# Altium PCB temp1.robcon.powerboard.PcbDoc
Units mil, origin at the board's own origin, x right, y up, seen from the top; angles counter-clockwise.
Board outline 6000 x 4000 mil, 2 copper layers (Top Layer, Bottom Layer); 15 components, 3 nets, 37 pads, 4 vias.
Unrouted connection lines stored in the file: 9.
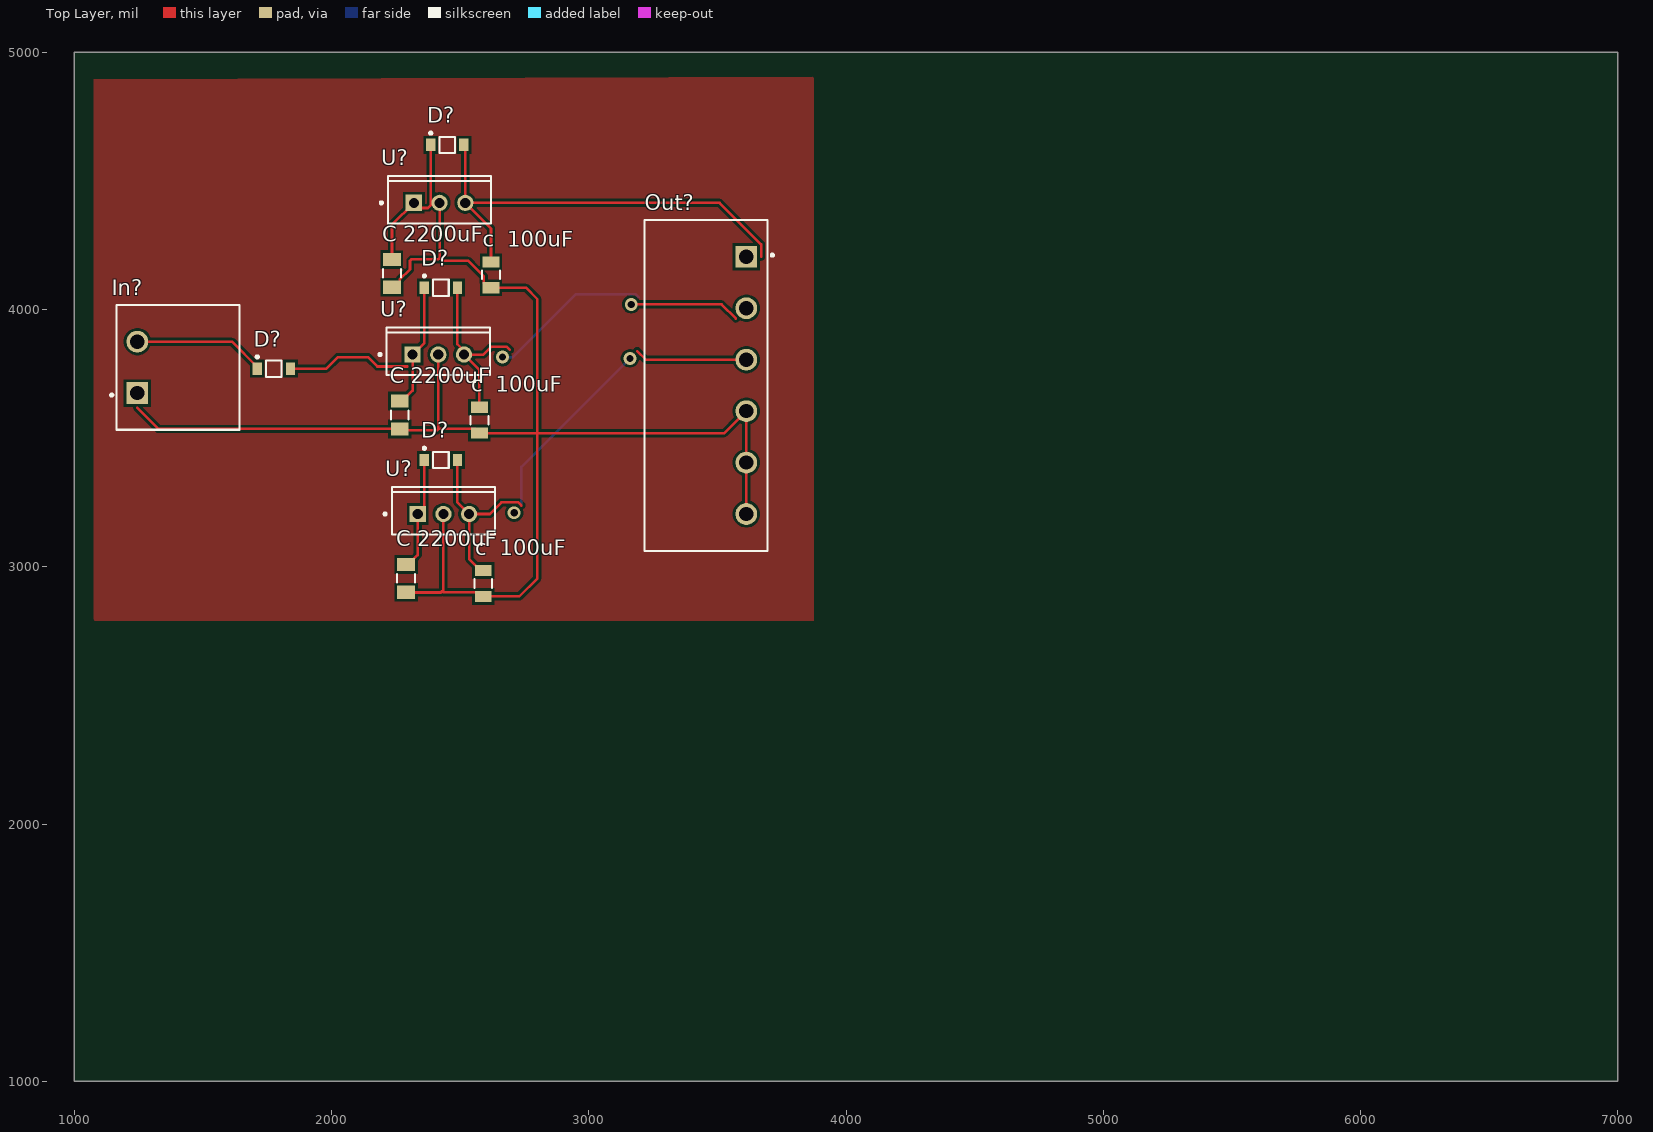
[diagram p0: Top Layer view]
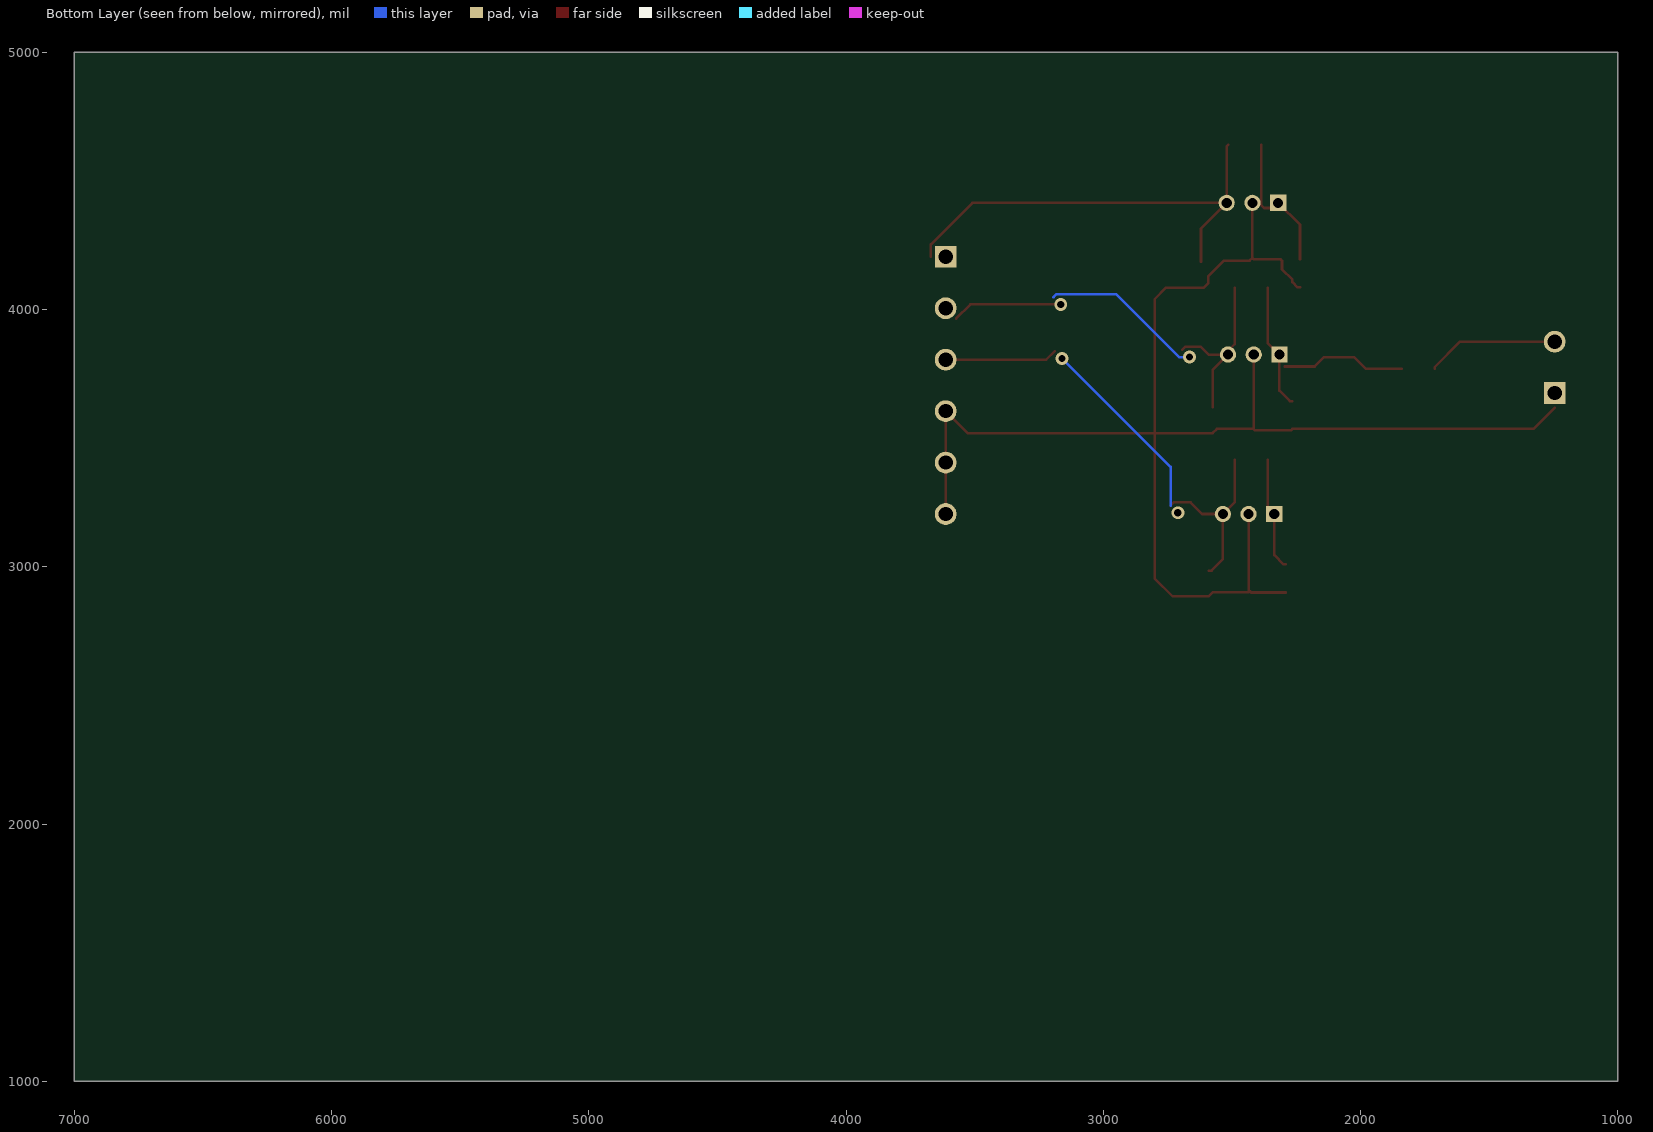
[diagram p1: Bottom Layer view, seen from below]
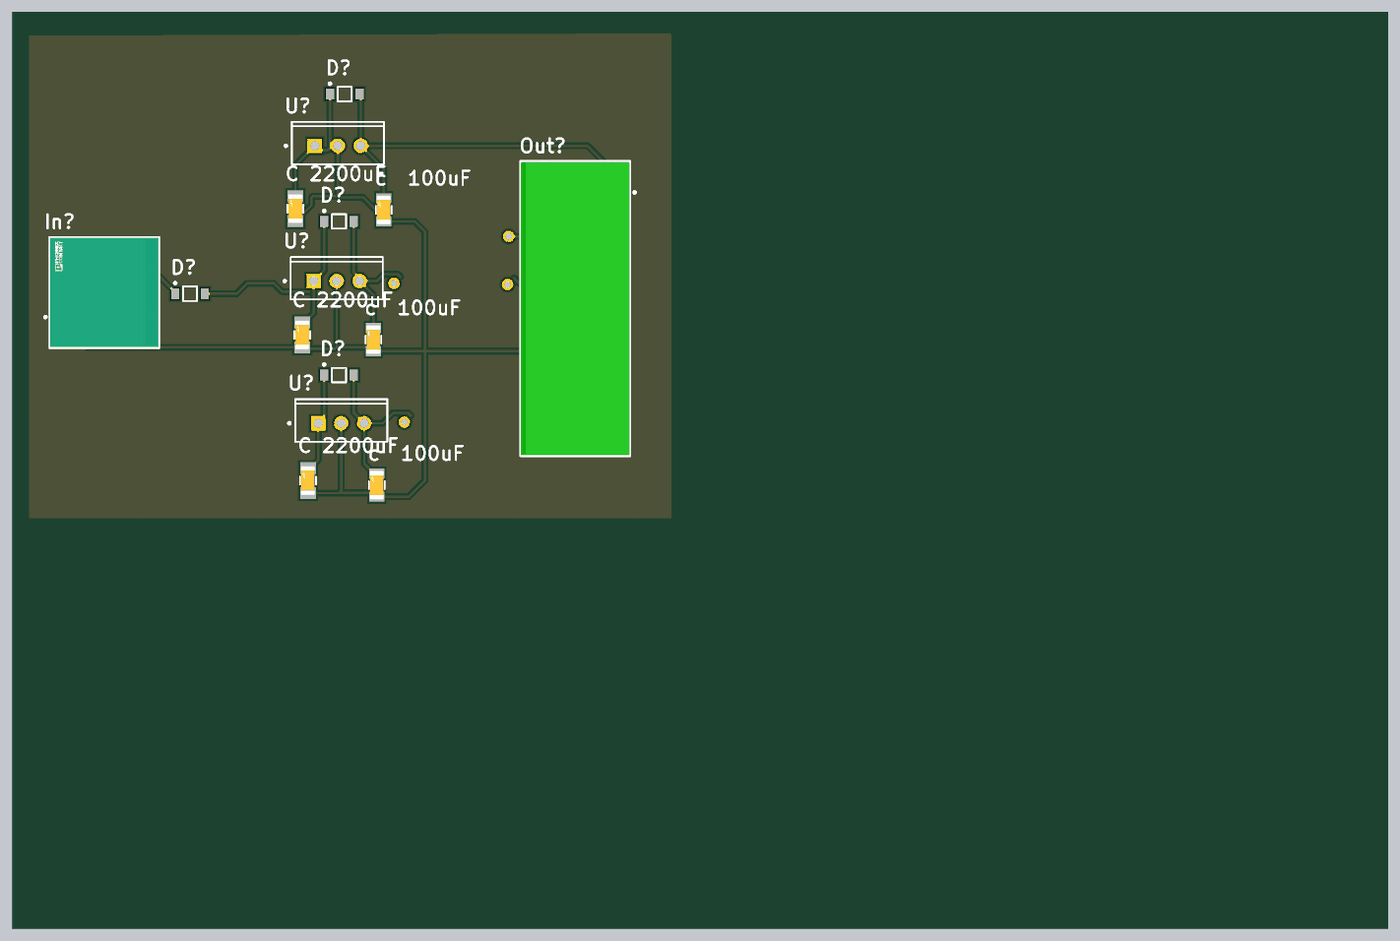
[diagram p2: 3D render of the assembled board from above, using the file's embedded part models]

## Layer stack, top to bottom
Top Solder: solder mask 0.4, Solder Resist, Dk 3.5
Top Layer: signal copper 1.4
Dielectric 1: dielectric 12.6, FR-4, Dk 4.8
Bottom Layer: signal copper 1.4
Bottom Solder: solder mask 0.4, Solder Resist, Dk 3.5

## Board outline
1000,1000 7000,1000 7000,5000 1000,5000

## Design rules (kind name [scope] priority, off if disabled: settings)
Clearance [All] p1: gap=10 ignorepadtopadclearanceinfootprint=FALSE except(0: Arc-Hole Track-Hole SMDPad-Hole THPad-Hole Via-Hole Fill-Hole Poly-Hole Region-Hole Text-Hole)
PolygonConnect [All] p1: connectstyle=Relief reliefconductorwidth=10 reliefentries=4 polygonreliefangle="90 Angle" airgapwidth=10
RoomDefinition "temp1.robcon.powerboard.sche in out" [InComponentClass('temp1.robcon.powerboard.sche in out')] p1: confinementstyle=ConfineIn formatcopy=TRUE lockcomponents=FALSE outline 2950,935 4035,935 4035,2355 2950,2355
RoomDefinition temp1.robcon.powerboard.sche [InComponentClass('temp1.robcon.powerboard.sche')] p2: confinementstyle=ConfineIn formatcopy=TRUE lockcomponents=FALSE outline 1615,2869.75 6400,2869.75 6400,3434.75 1615,3434.75
RoutingVias [All] p1: holewidth=28 width=50 viastyle="Through Hole" minholewidth=28 minwidth=50 maxholewidth=28 maxwidth=50
SolderMaskExpansion [All] p1: expansion=4 istentingtop=FALSE
Width [All] p1: maxlimit=10 minlimit=10 preferedwidth=10
30 further rules are at their usual default settings.

## Classes and differential pairs
component class temp1.robcon.powerboard.sche: "c  100uF" D?
component class "temp1.robcon.powerboard.sche in out": In? Out?

## Components (designator, comment, footprint, x,y, rotation, side; value= is the part's Value field where it differs from the comment)
"C 2200uF" "CL31C221JGFNNNF" FP-CL31-IPC_B 2265,3590 r90 top
"C 2200uF" "CL31C221JGFNNNF" FP-CL31-IPC_B 2235,4140.56 r90 top
"C 2200uF" "CL31C221JGFNNNF" FP-CL31-IPC_B 2290,2955 r90 top
"c  100uF" "CL31C221JGFNNNF" FP-CL31-IPC_C 2575,3569.75 r90 top
"c  100uF" "CL31C221JGFNNNF" FP-CL31-IPC_C 2620,4135 r90 top
"c  100uF" "CL31C221JGFNNNF" FP-CL31-IPC_C 2590,2935 r90 top
D? "MMSZ4713T1G" ONSC-SOD-123-2-425-04_V 2450,4640 r0 top
D? "MMSZ4713T1G" ONSC-SOD-123-2-425-04_V 2425,3415 r0 top
D? "MMSZ4713T1G" ONSC-SOD-123-2-425-04_V 1775.63,3770 r0 top
D? "MMSZ4713T1G" ONSC-SOD-123-2-425-04_V 2425,4085 r0 top
In? "1757242" FP-1757242-MFG 1402.48,3775 r90 top
Out? "1757284" FP-1757284-MFG 3455,3705 r270 top
U? "LM7805CT" FAIR-TO-220-3 2420,4414.75 r90 top
U? "LM7805CT" FAIR-TO-220-3 2435,3205 r90 top
U? "LM7805CT" FAIR-TO-220-3 2415,3825 r90 top

## Footprints (in the part's own frame and the unit in brackets; to place one, negate y for a bottom-side part, rotate by r counter-clockwise, add the part's x,y. Pads: shape width x height; smd on the part's side, far side on the other; paste and mask are expansions set on the pad)
FAIR-TO-220-3 [mm] "FM, 3-Leads, Body 10.2x4.7mm, Pitch 2.54mm"
  rect 1.6x1.6 hole 1: 1(0,2.54)
  round 1.6 hole 1: 2(0,0) 3(0,-2.54)
  silkscreen extent -2.04,-5.1 2.66,5.87, body extent -2.04,-5.1 2.66,5.1, height 18.95
FP-1757242-MFG [mm]
  rect 2.15x2.15 hole 1.4 paste-1000 mask+0: 1(-2.54,4)
  round 2.15 hole 1.4 paste-1000 mask+0: 2(2.54,4)
  silkscreen extent -6.15,-6.07 6.15,6.65, body extent -6.25,-6.17 6.25,6.17, height 0.25
FP-1757284-MFG [mm]
  rect 2.15x2.15 hole 1.4 paste-1000 mask+0: 1(-12.7,4)
  round 2.15 hole 1.4 paste-1000 mask+0: 2(-7.62,4) 3(-2.54,4) 4(2.54,4) 5(7.62,4) 6(12.7,4)
  silkscreen extent -16.34,-6.07 16.34,6.7, body extent -16.44,-6.17 16.44,6.17, height 0.25
FP-CL31-IPC_B [mil]
  rect 51.4x69.22 smd paste+0 mask+0: 1(-54.19,0) 2(54.19,0)
  silkscreen extent -17,-35 17,35, body extent -90,-44 90,44, height 10
FP-CL31-IPC_C [mil]
  rect 43.52x65.28 smd paste+0 mask+0: 1(-50.25,0) 2(50.25,0)
  silkscreen extent -17,-34 17,34, body extent -76,-38 76,38, height 10
ONSC-SOD-123-2-425-04_V [mm] "SOD, 2-Leads, Body 2.69x1.6mm"
  rect 0.91x1.22 smd: 1(-1.635,0) 2(1.635,0)
  silkscreen extent -1.76,-0.8 0.78,1.28, body extent -1.35,-0.8 1.35,0.8, height 1.35

## Part data
"C 2200uF" "C 2200uF" "C 2200uF": library part CMP-13271-001211-1, "Cap Ceramic 2200uF 500V C0G ±5% SMD 1206 +125°C Embossed T/R", Capacitance=2200uF, Case/Package=1206, Dielectric=C0G, Max Operating Temperature=125°C, Min Operating Temperature=-55°C, Package Quantity=10000, Tolerance=5%, Voltage Rating=500V, Depth=1.6mm, Height=1.25mm, Length=3.2mm, Mount="Surface Mount", Packaging="Tape and Reel", Radiation Hardening=No, Thickness=0.055inch, Voltage Rating (DC)=500V, Width=0.063inch
"c  100uF" "c  100uF" "c  100uF": library part CMP-13271-001211-1, "Cap Ceramic 100uF 500V C0G ±5% SMD 1206 +125°C Embossed T/R", Capacitance=100uF, Case/Package=1206, Dielectric=C0G, Max Operating Temperature=125°C, Min Operating Temperature=-55°C, Package Quantity=10000, Tolerance=5%, Voltage Rating=500V, Depth=1.6mm, Height=1.25mm, Length=3.2mm, Mount="Surface Mount", Packaging="Tape and Reel", Radiation Hardening=No, Thickness=0.055inch, Voltage Rating (DC)=500V, Width=0.063inch
D? D? D? D?: library part CMP-1060-00318-1, "Zener Voltage Regulator, 500 mW, 2-Pin SOD-123, Pb-Free, Tape and Reel", Manufacturer="On Semiconductor", ComponentLink1Description="Manufacturer URL", ComponentLink1URL=http://www.onsemi.com/, ComponentLink2Description=Datasheet, ComponentLink2URL=http://www.onsemi.com/pub_link/Collateral/MMSZ4678T1-D.PDF, ComponentLink3Description="Package Specification", ComponentLink3URL=http://www.onsemi.com/pub_link/Collateral/425-04.PDF, DatasheetVersion="Rev. 9", Mounting Technology="Surface Mount", P Max (W)=0.5, PackageDescription="2-Pin SOD, Body 1.6 x 2.69 mm", PackageReference=SOD-123-2-425-04, PackageVersion="Rev. G, 10/2009", Packing="Tape and Reel", PartNumber=MMSZ4713T1G, RoHS=Pb-Free, VZ Typ (V)=30
In?: library part CMP-09399-000010-1, "TERM BLOCK HDR 2POS 90DEG 5.08MM", Color=Grey, Current=15A, Current Rating=12A, Flammability Rating="UL94 V-0", Housing Color=Green, Package Quantity=50, Voltage=300V, Voltage Rating=250V, Voltage Rating (DC)=320V, Approvals=UL, Connector Type=Plug, Contact Material=Tin, Contact Plating=Tin, Depth=12mm, Gender=Male, Height=12.08mm, Housing Material=PBT, Lead Free="Lead Free", Length=12.16mm, Max Current Rating=12A, Mount="Through Hole", Number of Contacts=2, Number of Levels=1, Number of Poles=2, Number of Positions=2, Number of Positions Per Level=2, Number of Rows=1, Orientation="Right Angle", Packaging=Bulk, Pitch=5.08mm, REACH SVHC="No SVHC", RoHS Compliant=Yes, Series=MSTBA, Termination=Solder, Weight=5.396916oz, Width=12.1mm
Out?: library part CMP-09399-000007-1, "TERM BLOCK HDR 6POS 90DEG 5.08MM", Color=Grey, Current=15A, Current Rating=12A, Flammability Rating="UL94 V-0", Housing Color=Green, Package Quantity=50, Voltage=300V, Voltage Rating=250V, Voltage Rating (DC)=320V, Approvals=UL, Connector Type=Plug, Contact Material=Tin, Contact Plating=Tin, Depth=12mm, Gender=Male, Height=12.1mm, Housing Material=Polybutylene, Lead Free="Lead Free", Length=32.48mm, Max Current Rating=12A, Mount="Through Hole", Number of Contacts=6, Number of Levels=1, Number of Poles=6, Number of Positions=6, Number of Positions Per Level=6, Number of Rows=1, Orientation="Right Angle", Packaging=Bulk, Pitch=5.08mm, REACH SVHC="No SVHC", RoHS Compliant=Yes, Series=MSTBA, Termination=Solder, Weight=5.396916oz, Width=32.4mm
U? U? U?: library part CMP-2000-04938-1, "Positive Voltage Regulator, 5 V, 1 A, -40 to 125 degC, 3-Pin TO-220, RoHS, Tube", Manufacturer=FairchildSemiconductor, Maximum Input Voltage=35V, Maximum Output Current=2.2(Typ)A, Maximum Quiescent Current=8mA, Operating Temperature=-40to125degC, Output Voltage=5V, Package=3TO-220AB, Package Description="3-Pin Through Hole Device, Body 10 x 4.5 mm, Pitch 2.54 mm", Package Reference=TO-220, Typical Dropout Voltage @ Current=2@1AV, Accuracy=±4%, Category=LinearRegulator, Datasheet URL=https://datasheet.ciiva.com/26904/lm7805ct-26904988.pdf, Datasheet Version=Aug-12, Line Regulation=100mV, Load Regulation=100mV, Manufacturer URL=https://www.fairchildsemi.com/, Mounting=ThroughHole, Number of Outputs=1, Output Type=Fixed, Package URL=https://www.fairchildsemi.com/package-drawings/TO/TO220B03.pdf, Packaging=Rail/Tube, Polarity=Positive, Rad Hard=No, Type=Linear

## Via types
v1: diameter 50, hole 28, Top Layer to Bottom Layer, 4 vias

## Nets (pads, with @x,y where several pads share a name; then routed paths per layer and width w, separated by ;. In a path a pad name is that pad's centre, name@x,y a point inside that pad or via, vN(x,y) a via of type N, cw(c..) or ccw(c..) an arc to the next point about the centre after c; other vN are vias at no path point)
5V: "C 2200uF.1" "C 2200uF.2" "c  100uF.1" "c  100uF.2" D?.1 D?.2@2489.37,3415 D?.2@2489.37,4085 D?.2@2514.37,4640 In?.2 Out?.4 Out?.5 Out?.6 U?.1 U?.2 U?.3 | length 11179.4
  Top Layer w10: 1245,3617.68 1326.86,3535.81 2265,3535.81 2270.81,3530 2409.14,3530 2415,3535.86 ; In?.2 1612.36,3875 1711.26,3776.1 D?.1@1711.26,3770 ; 2235,4086.37 2243.91,4086.37 2264.61,4107.07 2264.61,4115.99 2305,4156.37 2305,4189.14 2310.86,4195 2414.14,4195 2420,4200.86 ; 2235,4194.75 2235,4329.75 2320,4414.75 2340,4394.75 2374.78,4394.75 2386.5,4406.47 2386.5,4513.29 2385.63,4514.16 D?.1@2385.63,4640 ; 2265,3644.19 2273.91,3644.19 2315,3685.28 2315,3825 2360.63,3870.63 D?.1@2360.63,4085 ; 2290,2900.81 2290.81,2900 2425,2900 2430,2905 ; 2290,3009.19 2298.91,3009.19 2335,3045.28 2335,3205 2360.63,3230.63 D?.1@2360.63,3415 ; U?.2@2415,3825 2415,3535.86 ; U?.2@2420,4414.75 2420,4200.86 ; U?.2@2435,3205 2435,2910 2430,2905 ; D?.2@2489.37,3415 2489.37,3250.63 U?.3@2535,3205 ; D?.2@2489.37,4085 2489.37,3864.97 2515,3839.34 U?.3@2515,3825 ; D?.2@2514.37,4640 2520,4634.37 U?.3@2520,4414.75 ; 2575,3620 2575,3765 U?.3@2515,3825 ; 2590,2985.25 2579.12,2985.25 2535,3029.37 U?.3@2535,3205 ; 2620,4185.25 2620,4314.75 U?.3@2520,4414.75 ; 2693.28,3843.28 2681.57,3855 2620.45,3855 2590.45,3825 U?.3@2515,3825 ; 2738.28,3238.28 2726.57,3250 2660.45,3250 2615.45,3205 U?.3@2535,3205 ; Out?.6 Out?.5 Out?.4 3526.98,3519.5 2800,3519.5 ; 3669.8,4205 3669.8,4253.54 3508.59,4414.75 U?.3@2520,4414.75 ; 2415,3535.86 2558.64,3535.86 2575,3519.5 2800,3519.5 ; 2420,4200.86 2430.86,4190 2530,4190 2592.36,4127.64 2592.36,4101.51 2609.12,4084.75 2620,4084.75 2755.25,4084.75 2800,4040 2800,3519.5 ; 2430,2905 2433.49,2901.51 2573.24,2901.51 2590,2884.75 2729.75,2884.75 2800,2955 2800,3519.5
"6S LiPo": D?.2@1840,3770 In?.1 | length 488.8
  Top Layer w10: D?.2@1840,3770 1980,3770 2025,3815 2141.75,3815 2178.25,3778.5 2295,3778.5
+5: Out?.1 Out?.2 Out?.3 | length 438
  Top Layer w10: 3188.28,3838.28 3221.57,3805 Out?.3
copper on no net: | length 1811
  Top Layer w10: v1(3165,4020) 3516.41,4020 3571.95,3964.47
  Bottom Layer w10: v1(2665,3815) 2705,3815 2830,3940 2950,4060 3181.57,4060 3193.28,4048.28 ; 2738.28,3238.28 2738.28,3388.28 v1(3160,3810)
  other v1: 2710,3210

## Polygon pours and split planes (outlines as drawn)
no net on Top Layer "NONET_L01_P000" (solid, pour order 0): 1075,4895 1075,2795 1080,2790 3875,2790 3875,4900 3870,4905